# EAGLE board rfm12_breakout_board (EAGLE 6.4)
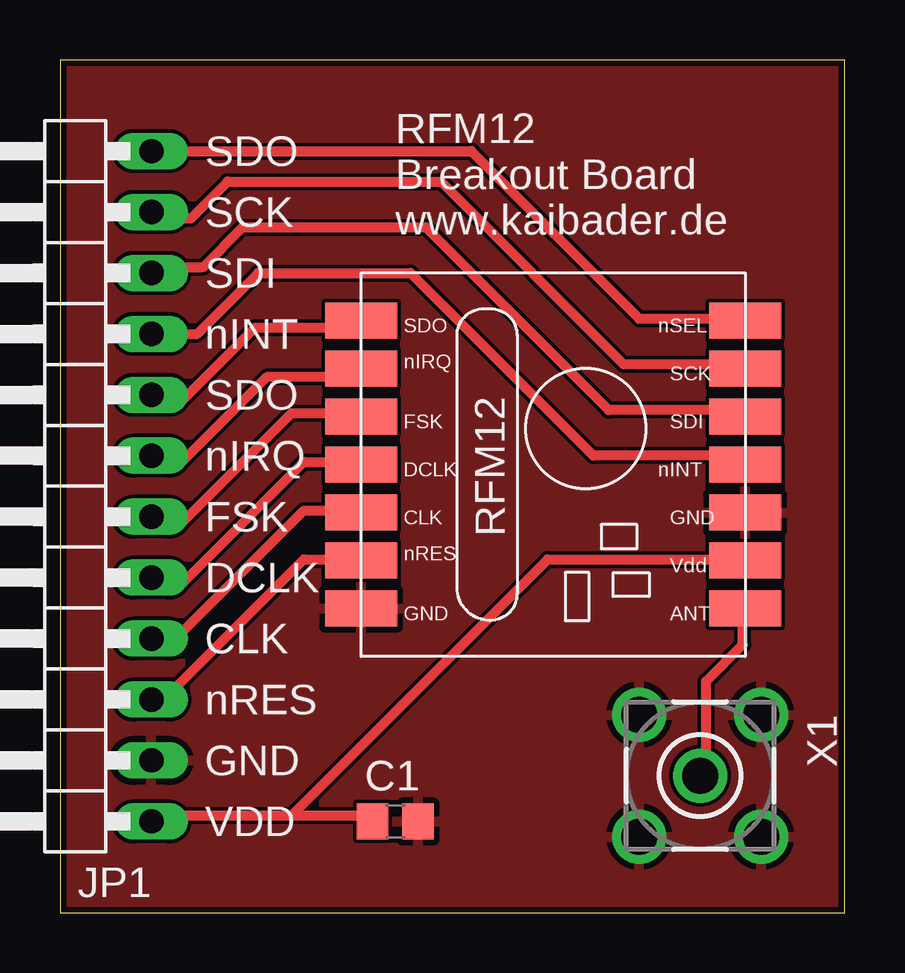
[diagram p0: board, top side]
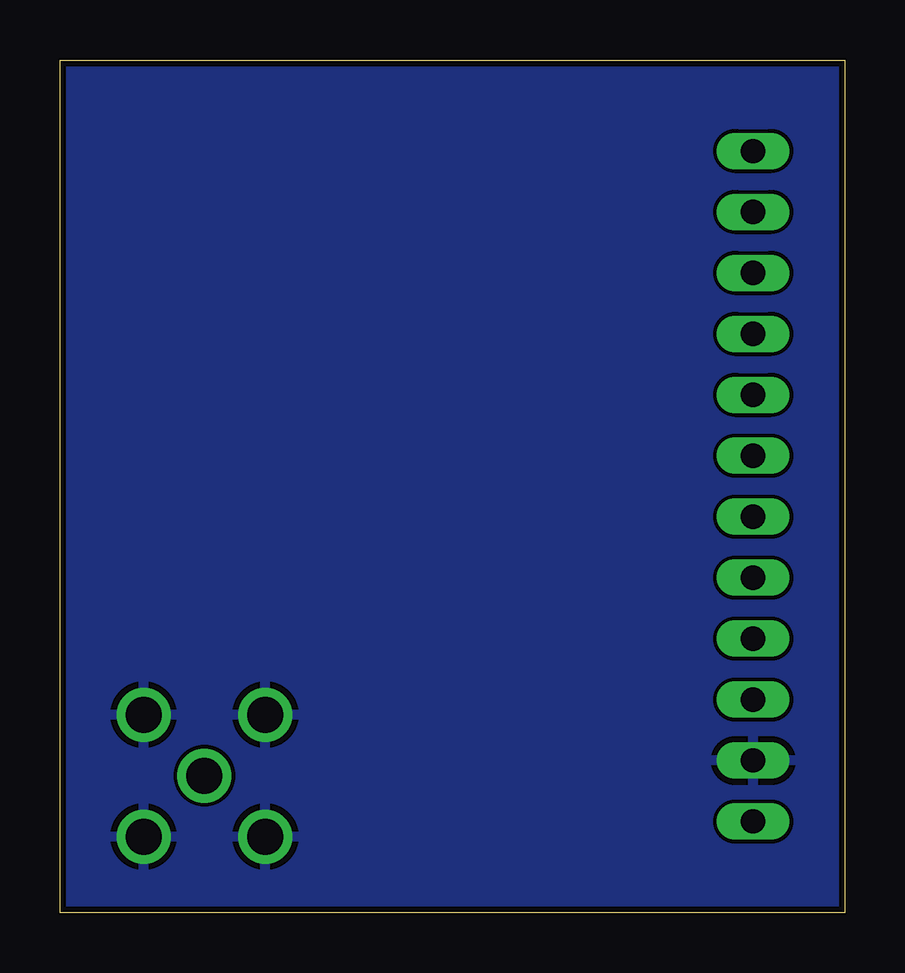
[diagram p1: board, bottom side, seen from below]

Size 32.69 x 35.55 mm. Coordinates in mm from the lower left corner, seen from the top.
Outline: 0,0 32.69,0 32.69,35.55 0,35.55 0,0
Copper layers (1*16): Top 0.035mm / dielectric 1.5mm / Bottom 0.035mm
Design rules "ITEADstudio_DRC": minimum track width 6mil, minimum drill 12mil, track to track 6mil, track to pad 6mil, pad to pad 6mil, via to via 6mil, smd to smd 0mil, copper to edge 10mil, drill to drill 10mil, minimum pad ring 10mil, minimum via ring 6mil, stop-mask expansion 2mil, vias tented up to drill 100mil, thermal gap 10mil

## Footprints (pad centres in the part's own frame; a part is rotated, then mirrored left to right if it is on the bottom)
C0805 = smd 1.3 x 1.5: 1 -0.95,0; 2 0.95,0
1X12/90 = drill 1.016 long: 1 -13.97,-3.81; 2 -11.43,-3.81; 3 -8.89,-3.81; 4 -6.35,-3.81; 5 -3.81,-3.81; 6 -1.27,-3.81; 7 1.27,-3.81; 8 3.81,-3.81; 9 6.35,-3.81; 10 8.89,-3.81; 11 11.43,-3.81; 12 13.97,-3.81
RFM12 = smd 1.5 x 3: 1 -5,-10; 2 -3,-10; 3 -1,-10; 4 1,-10; 5 3,-10; 6 5,-10; 7 7,-10; 8 7,6; 9 5,6; 10 3,6; 11 1,6; 12 -1,6; 13 -3,6; 14 -5,6
LTI-SASF54GT = drill 1.5 pad 2.2: 1 0,0; 2 -2.54,2.54; 3 2.54,2.54; 4 2.54,-2.54; 5 -2.54,-2.54

## Placement (x,y rotation side)
C1  100nF  [C0805]  13.97,3.81 0 top
JP1  [1X12/90]  0,17.78 90 top
U$1  RFM12  [RFM12]  22.54,19.68 270 top
X1  LTI-SASF54GT  [LTI-SASF54GT]  26.67,5.71 270 top

## Library data of the parts
C1 = rcl
JP1 = pinhead
U$1 = kaibader
X1 = con-coax; OC_FARNELL: unknown; OC_NEWARK: unknown

## Nets
CLK: JP1.4 U$1.5
DCLK: JP1.5 U$1.4
FSK: JP1.6 U$1.3
GND: C1.2 JP1.2 U$1.7 U$1.10 X1.2 X1.3 X1.4 X1.5
N$1: U$1.8 X1.1
NINT: JP1.9 U$1.11
NIRQ: JP1.7 U$1.2
NRES: JP1.3 U$1.6
NSEL: JP1.12 U$1.14
SCK: JP1.11 U$1.13
SDI: JP1.10 U$1.12
SDO: JP1.8 U$1.1
VCC: C1.1 JP1.1 U$1.9

## Tracks (layer width: path | path; a pad name or v marks a point on that pad's centre or on a via)
CLK
  Top 0.406: U$1.5 12.19,16.76 10.16,16.76 5.08,11.68 4.06,11.68 JP1.4
DCLK
  Top 0.406: U$1.4 12.19,18.8 10.16,18.8 5.08,13.72 4.06,13.72 JP1.5
FSK
  Top 0.406: U$1.3 12.19,20.83 9.65,20.83 5.08,16.26 4.06,16.26 JP1.6
GND
  pour Bottom: 0,35.56 33.02,35.56 33.02,0 0,0
  pour Top: 0,35.56 33.02,35.56 33.02,0 0,0
N$1
  Top 0.406: U$1.8 28.45,12.19 28.45,11.18 26.92,9.65 26.92,6.1 X1.1
NINT
  Top 0.406: JP1.9 5.71,24.13 8.26,26.67 14.61,26.67 22.23,19.05 28.18,19.05 U$1.11
NIRQ
  Top 0.406: U$1.2 12.19,22.35 8.64,22.35 5.08,18.8 4.06,18.8 JP1.7
NRES
  Top 0.406: U$1.6 12.19,14.73 10.16,14.73 4.06,8.64 JP1.3
NSEL
  Top 0.406: JP1.12 17.14,31.75 24.13,24.77 28.46,24.77 U$1.14
SCK
  Top 0.406: U$1.13 28.45,22.86 23.5,22.86 15.88,30.48 6.99,30.48 5.46,28.96 4.06,28.96 JP1.11
SDI
  Top 0.406: 28.45,20.83 U$1.12 28.27,20.95 22.86,20.95 15.24,28.57 7.62,28.57 5.97,26.92 4.06,26.92 JP1.10
SDO
  Top 0.406: U$1.1 12.19,24.38 8.13,24.38 5.08,21.34 4.06,21.34 JP1.8
VCC
  Top 0.406: 9.65,4.06 4.06,4.06 JP1.1 | 9.65,4.06 12.7,4.06 C1.1 | 9.65,4.06 20.32,14.73 28.45,14.73 U$1.9

## Text on the board
tPlace: SDO | SCK | RFM12 / Breakout Board / www.kaibader.de | SDI | nINT | SDO | nIRQ | FSK | DCLK | CLK | nRES | GND | VDD